# Altium PCB PCB_2020-09-19_20-09-52_2022-01-26.pcbdoc
Units mm, origin at the board's own origin, x right, y up, seen from the top; angles counter-clockwise.
Board outline 71.37 x 52.2 mm, 2 copper layers (Top Layer, Bottom Layer); 12 components, 14 nets, 43 pads, 0 vias.
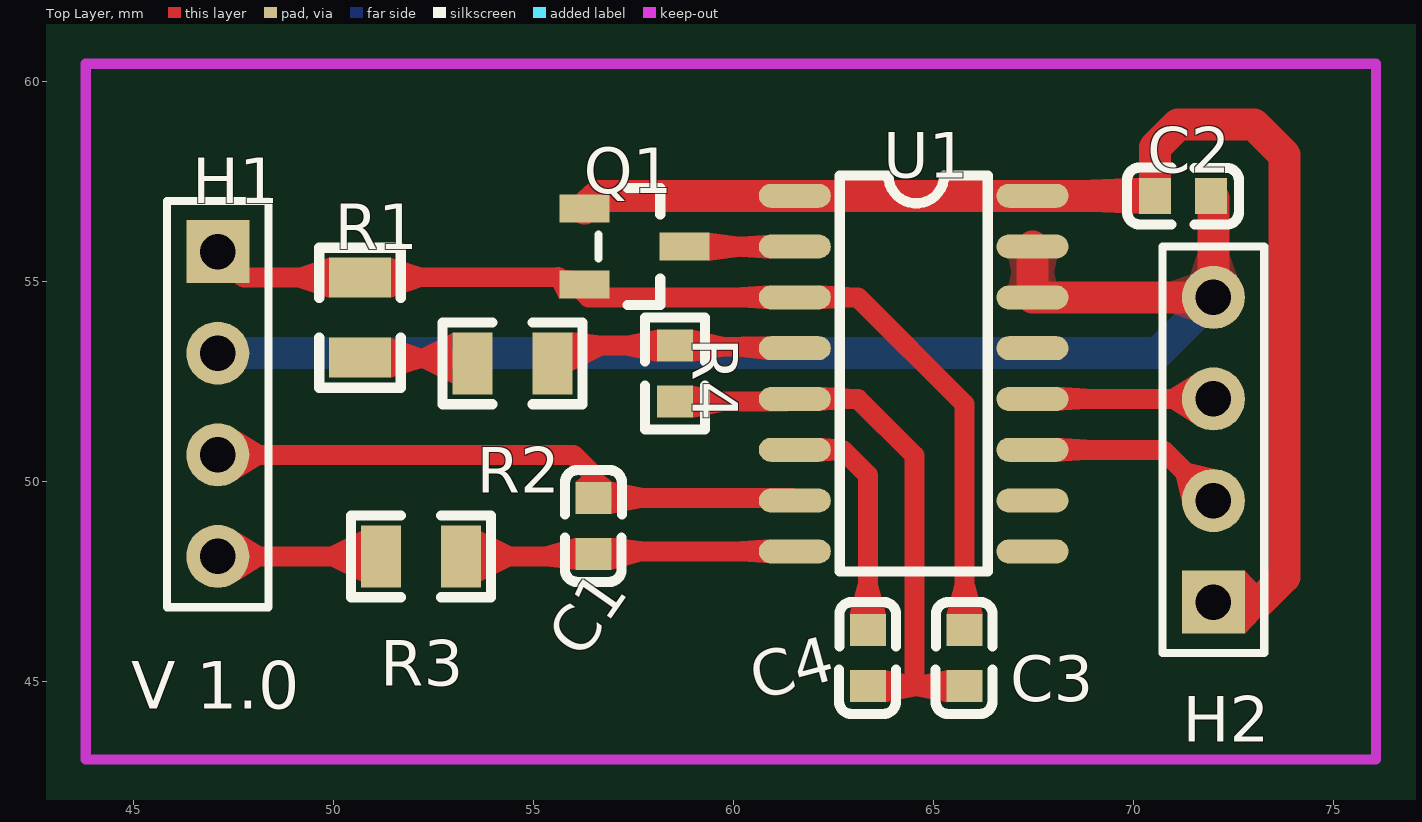
[diagram p0: Top Layer view]
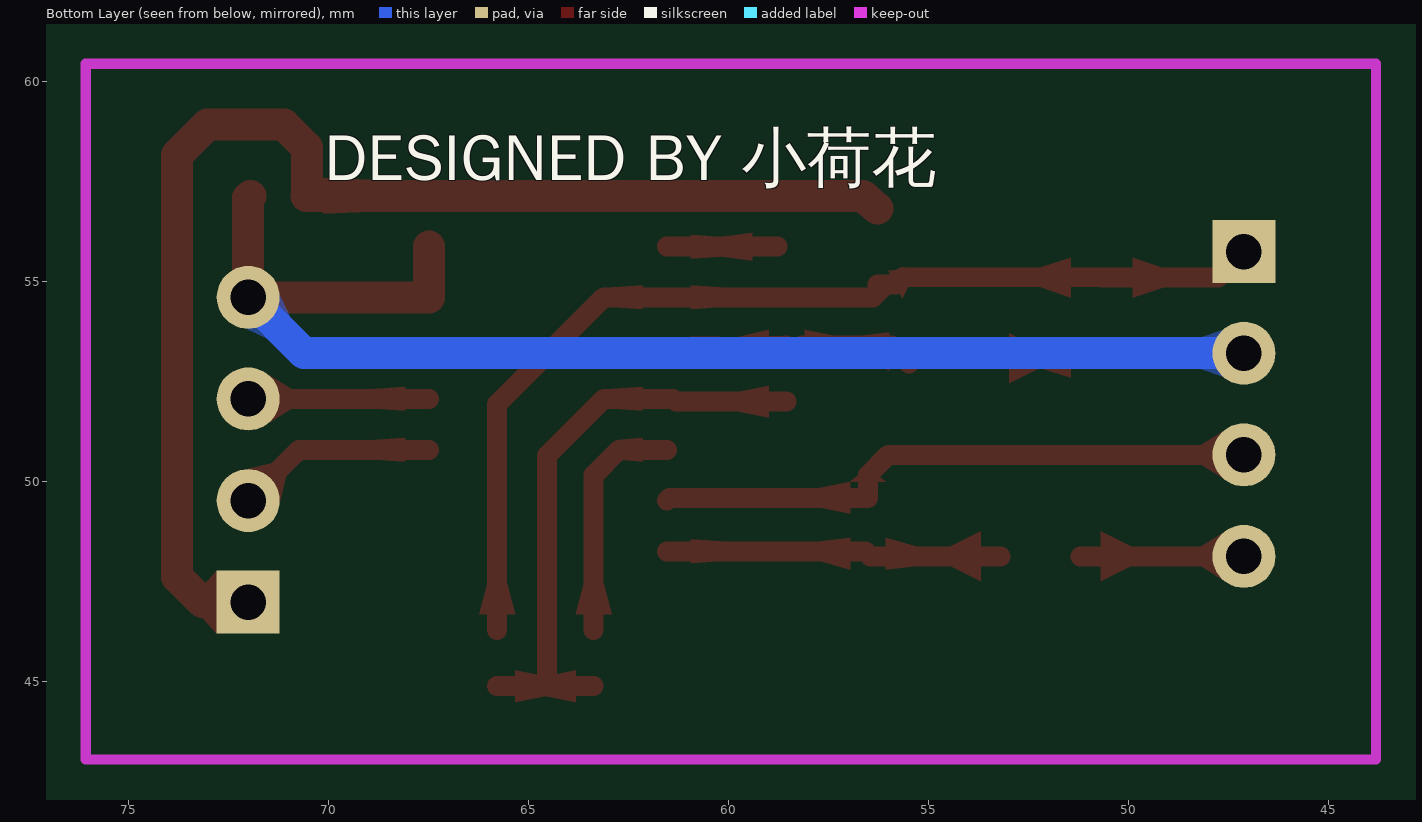
[diagram p1: Bottom Layer view, seen from below]

## Layer stack, top to bottom
Top Layer: signal copper (thickness not stored)
Dielectric: dielectric 0.32, FR-4, Dk 4.8
Bottom Layer: signal copper (thickness not stored)

## Board outline
96.774,25.4 25.4,25.4 25.4,77.597 96.774,77.597

## Components (designator, comment, footprint, x,y, rotation, side; value= is the part's Value field where it differs from the comment)
C1 "0.1uf" C0603 56.516,48.895 r90 top
C2 "1u" C0603 71.247,57.15 r180 top
C3 "1u" C0603 65.786,45.593 r90 top
C4 "1u" C0603 63.373,45.593 r90 top
H1 "HDR-F-2.54_1x4" HDR-F-2.54_1X4 47.117,51.943 r270 top
H2 "HDR-F-2.54_1x4" HDR-F-2.54_1X4 72.009,50.8 r90 top
Q1 "8550D" SOT-23-3_L2.9-W1.6-P1.90-LS2.8-BR-CW 57.531,55.88 r180 top
R1 "10k" R0805 50.673,54.102 r90 top
R2 "10k" R0805 54.483,52.959 r180 top
R3 "1k" R0805 52.197,48.133 r0 top
R4 "8.2k" R0603 58.547,52.705 r270 top
U1 "HX711" SOP-16_L10.0-W3.9-P1.27-LS6.0-BL 64.516,52.705 r270 top

## Footprints (in the part's own frame and the unit in brackets; to place one, negate y for a bottom-side part, rotate by r counter-clockwise, add the part's x,y. Pads: shape width x height; smd on the part's side, far side on the other; paste and mask are expansions set on the pad)
C0603 [mm]
  rect 0.8x0.9 smd: 1(-0.7,0) 2(0.7,0)
  silkscreen extent -1.4,-0.7 1.4,0.72
HDR-F-2.54_1X4 [mil]
  rect 62x62 hole 35: 1(-150,0)
  round 62 hole 35: 2(-50,0) 3(50,0) 4(150,0)
  silkscreen extent -200,-50 200,50
R0603 [mm]
  rect 0.8x0.9 smd: 1(-0.7,0) 2(0.7,0)
  silkscreen extent -1.4,-0.75 1.4,0.76
R0805 [mm]
  rect 1x1.55 smd: 1(-1,0) 2(1,0)
  silkscreen extent -1.75,-1.02 1.75,1.02
SOP-16_L10.0-W3.9-P1.27-LS6.0-BL [mm]
  oval 0.6x1.8 smd: 1(-4.445,-2.972) 2(-3.175,-2.972) 3(-1.905,-2.972) 4(-0.635,-2.972) 5(0.635,-2.972) 6(1.905,-2.972) 7(3.175,-2.972) 8(4.445,-2.972) 9(4.445,2.972) 10(3.175,2.972) 11(1.905,2.972) 12(0.635,2.972) 13(-0.635,2.972) 14(-1.905,2.972) 15(-3.175,2.972) 16(-4.445,2.972)
  silkscreen extent -4.95,-1.85 4.95,1.85
SOT-23-3_L2.9-W1.6-P1.90-LS2.8-BR-CW [mm]
  rect 1.25x0.7 smd: 1(1.25,-0.95) 2(-1.25,0) 3(1.25,0.95)
  silkscreen extent -0.65,-1.46 0.9,1.46

## Nets (pads, with @x,y where several pads share a name; then routed paths per layer and width w, separated by ;. In a path a pad name is that pad's centre, name@x,y a point inside that pad or via, vN(x,y) a via of type N, cw(c..) or ccw(c..) an arc to the next point about the centre after c; other vN are vias at no path point)
C1_1: C1.1 R3.2 U1.8 | length 9.8
  Top Layer w0.5: R3.2 56.454,48.133 C1.1 ; 57.851,48.26 C1.1@56.581,48.26 ; U1.8 C1.1@56.581,48.26 ; C1.1 C1.1@56.581,48.26 ; C1.1 C1.1@56.581,48.26
C1_2: C1.2 H1.3 U1.7 | length 15.2
  Top Layer w0.5: H1.3 56.007,50.673 56.515,50.165 56.515,49.593 61.478,49.593 U1.7
C3_2: C3.2 H1.1 Q1.3 R1.2 U1.3 | length 26.3
  Top Layer w0.5: H1.1 47.767,55.103 R1.2 55.626,55.118 55.814,54.93 Q1.3 ; Q1.3@56.068,54.93 56.388,54.61 U1.3@61.689,54.61 ; U1.3 63.119,54.61 65.786,51.943 C3.2
C4_2: C4.2 U1.6 | length 6
  Top Layer w0.5: U1.6 62.738,50.8 63.373,50.165 C4.2
GND: C2.1 H1.2 H2.4 U1.14 U1.15 | length 33.8
  Top Layer w0.8: U1.15 U1.14 H2.4 72.009,57.089 C2.1
  Bottom Layer w0.8: H1.2 70.612,53.213 H2.4
OUT: H2.3 U1.12 | length 4.5
  Top Layer w0.5: U1.12 H2.3
R1_1: R1.1 R2.2 | length 2.6
  Top Layer w0.5: R1.1 R2.2@53.228,53.086
R3_1: H1.4 R3.1 | length 4.1
  Top Layer w0.5: H1.4 R3.1
R4_1: R2.1 R4.1 U1.4 | length 5.9
  Top Layer w0.5: R2.1 55.928,53.406 R4.1@58.166,53.406 ; R4.1 U1.4
R4_2: C3.1 C4.1 R4.2 U1.5 | length 14.8
  Top Layer w0.5: R4.2 61.318,52.004 61.384,52.07 63.119,52.07 64.534,50.655 64.534,44.892 ; C4.1 C3.1
S$68: 
SCK: H2.2 U1.11 | length 5
  Top Layer w0.5: U1.11 70.739,50.8 H2.2
U1_2: Q1.2 U1.2 | length 2.8
  Top Layer w0.5: Q1.2 U1.2
VCC: C2.2 H2.1 Q1.1 U1.1 U1.16 | length 32
  Top Layer w0.8: Q1.1 56.642,57.15 U1.1 U1.16 C2.2@70.549,57.15 ; C2.2 70.546,58.354 71.12,58.928 73.025,58.928 73.787,58.166 73.787,47.625 73.152,46.99 H2.1
pads on no net: U1.9 U1.10 U1.13

## Polygon pours and split planes (outlines as drawn)
GND on Bottom Layer (solid): 39.624,63.627 38.735,62.738 38.735,40.132 40.767,38.1 81.153,38.1 81.534,38.481 81.534,63.246
GND on Top Layer (solid): 38.1,38.1 38.1,63.119 39.878,64.897 84.074,64.262 84.074,64.389 84.074,64.262 84.074,40.386 82.804,39.116 39.116,39.116 38.1,38.1

## Other copper
Top Layer:
  region net SCK: 71.223,49.481 72.058,50.316 71.428,50.465 71.074,50.111
  region net OUT: 71.488,51.479 71.488,52.661 70.937,52.32 70.937,51.82
  region net C1_2: 47.638,50.082 47.638,51.264 48.189,50.923 48.189,50.423
  region net R3_1: 47.638,47.542 47.638,48.724 48.189,48.383 48.189,47.883
  region net R4_2: 58.997,52.405 58.997,51.605 59.747,51.755 59.747,52.255
  region net R4_1: 58.997,53.805 58.997,53.005 59.747,53.129 59.747,53.629
  region net R4_1: 58.097,53.005 58.097,53.805 57.347,53.655 57.347,53.155
  region net R4_2: 63.823,45.293 63.823,44.493 64.573,44.643 64.573,45.143
  region net C4_2: 62.923,46.693 63.823,46.693 63.623,47.443 63.123,47.443
  region net R4_2: 65.336,44.493 65.336,45.293 64.586,45.143 64.586,44.643
  region net C3_2: 65.336,46.693 66.236,46.693 66.036,47.443 65.536,47.443
  region net C1_1: 56.965,48.595 56.965,47.795 57.715,48.01 57.715,48.51
  region net C1_1: 56.065,47.795 56.065,48.595 55.315,48.383 55.315,47.883
  region net C1_1: 56.965,48.595 56.965,47.795 57.715,48.01 57.715,48.51
  region net C1_2: 56.065,49.995 56.965,49.995 56.765,50.165 56.265,50.165
  region net C1_2: 56.965,49.995 56.965,49.195 57.715,49.345 57.715,49.845
  region net VCC: 72.796,47.777 72.796,46.203 73.152,46.59 73.152,47.39
  region net C3_2: 51.448,55.602 51.448,54.602 52.198,54.857 52.198,55.357
  region net C3_2: 49.898,54.602 49.898,55.602 49.148,55.352 49.148,54.852
  region net R1_1: 51.448,53.602 51.448,52.602 52.198,52.842 52.198,53.342
  region net R1_1: 52.982,52.463 52.982,53.713 52.232,53.342 52.232,52.842
  region net R4_1: 55.984,53.734 55.984,52.78 56.734,53.155 56.734,53.655
  region net C1_1: 53.698,48.758 53.698,47.508 54.448,47.883 54.448,48.383
  region net R3_1: 50.696,47.508 50.696,48.758 49.946,48.383 49.946,47.883
  region net U1_2: 59.405,56.23 59.405,55.53 60.155,55.63 60.155,56.13
  region net C3_2: 55.657,54.579 56.009,55.281 55.803,55.295 55.508,54.883
  region net VCC: 70.147,56.7 70.147,57.6 68.947,57.55 68.947,56.75
  region net SCK: 68.088,50.5 68.088,51.1 68.838,51.05 68.838,50.55
  region net OUT: 68.088,51.77 68.088,52.37 68.838,52.32 68.838,51.82
  region net C1_1: 60.944,47.96 60.944,48.56 60.194,48.51 60.194,48.01
  region net C4_2: 62.144,50.5 62.144,51.1 62.738,51.05 62.738,50.55
  region net R4_2: 62.144,51.77 62.144,52.37 62.894,52.32 62.894,51.82
  region net R4_1: 60.956,53.64 60.932,53.04 60.185,53.119 60.205,53.619
  region net C3_2: 60.944,54.31 60.944,54.91 60.194,54.86 60.194,54.36
  region net C3_2: 62.144,54.31 62.144,54.91 62.894,54.86 62.894,54.36
  region net U1_2: 60.944,55.58 60.944,56.18 60.194,56.13 60.194,55.63

## Silkscreen, mask and mechanical layers (free items; w line width, h text height)
Top Overlay:
  text "V 1.0" at 44.958,43.942 h2.03
Bottom Overlay:
  text "DESIGNED BY 小荷花" at 70.104,57.15 h2.03
Document:
  lines w0.003: 61.087,51.498 61.087,51.499